# Altium PCB TX.PcbDoc
Units mm, origin at the board's own origin, x right, y up, seen from the top; angles counter-clockwise.
Board outline 49.94 x 30.61 mm, 2 copper layers (Top Layer, Bottom Layer); 55 components, 51 nets, 204 pads, 61 vias.
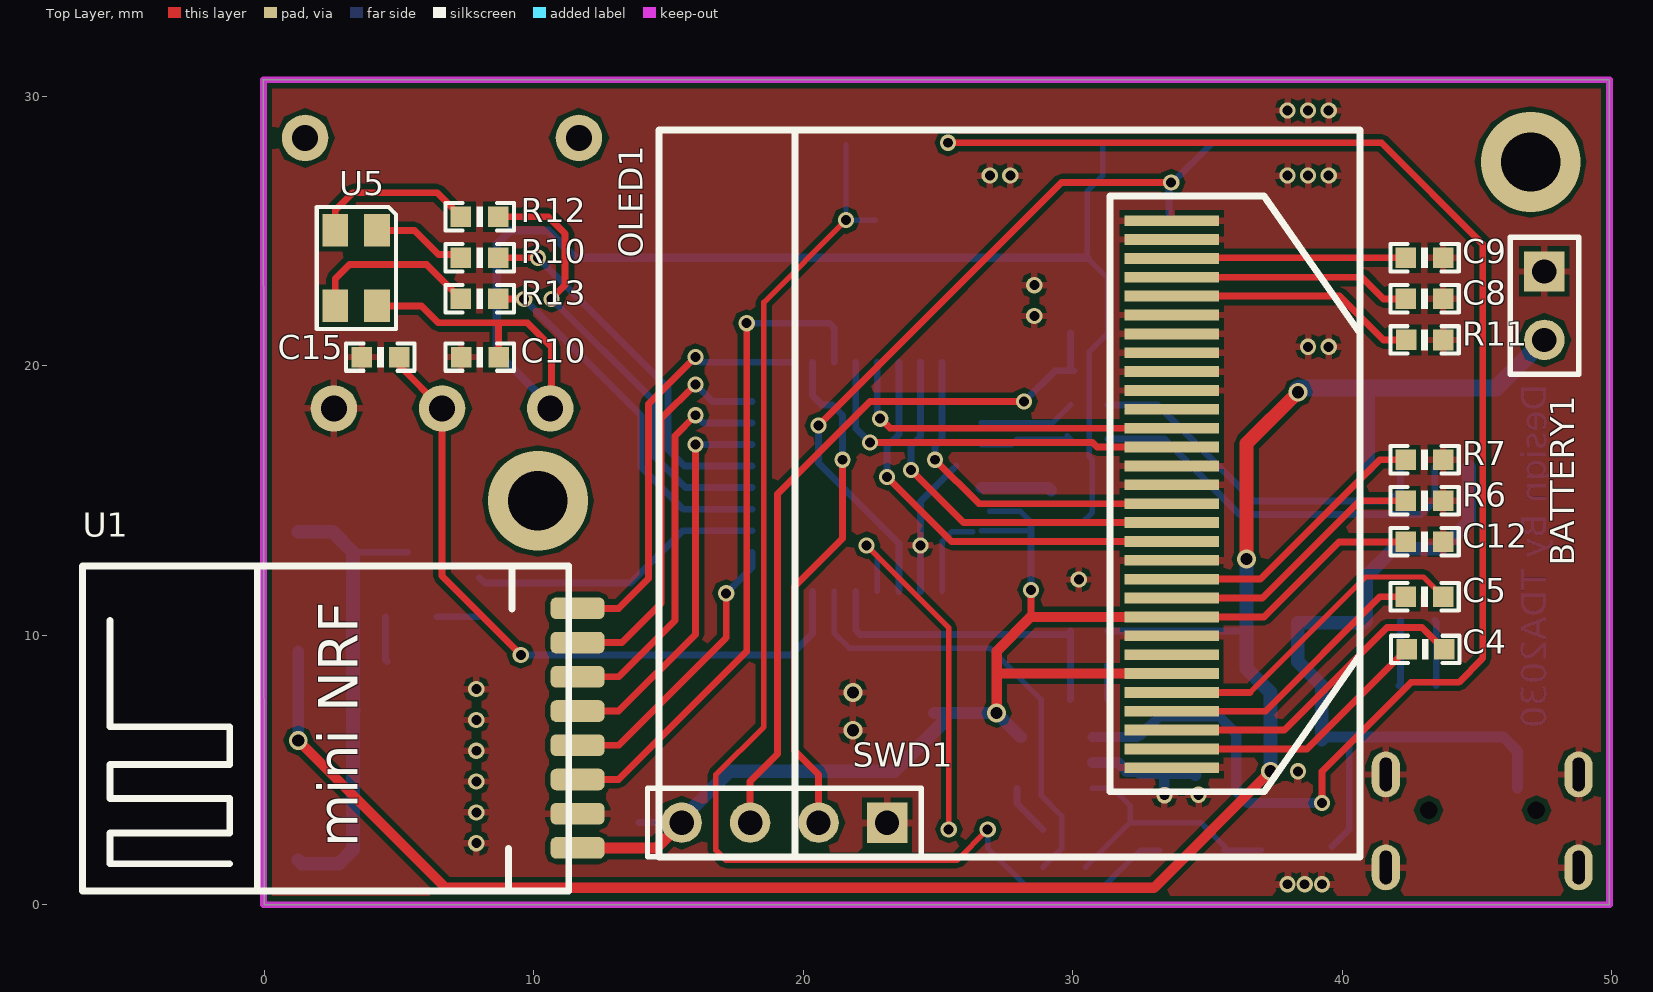
[diagram p0: Top Layer view]
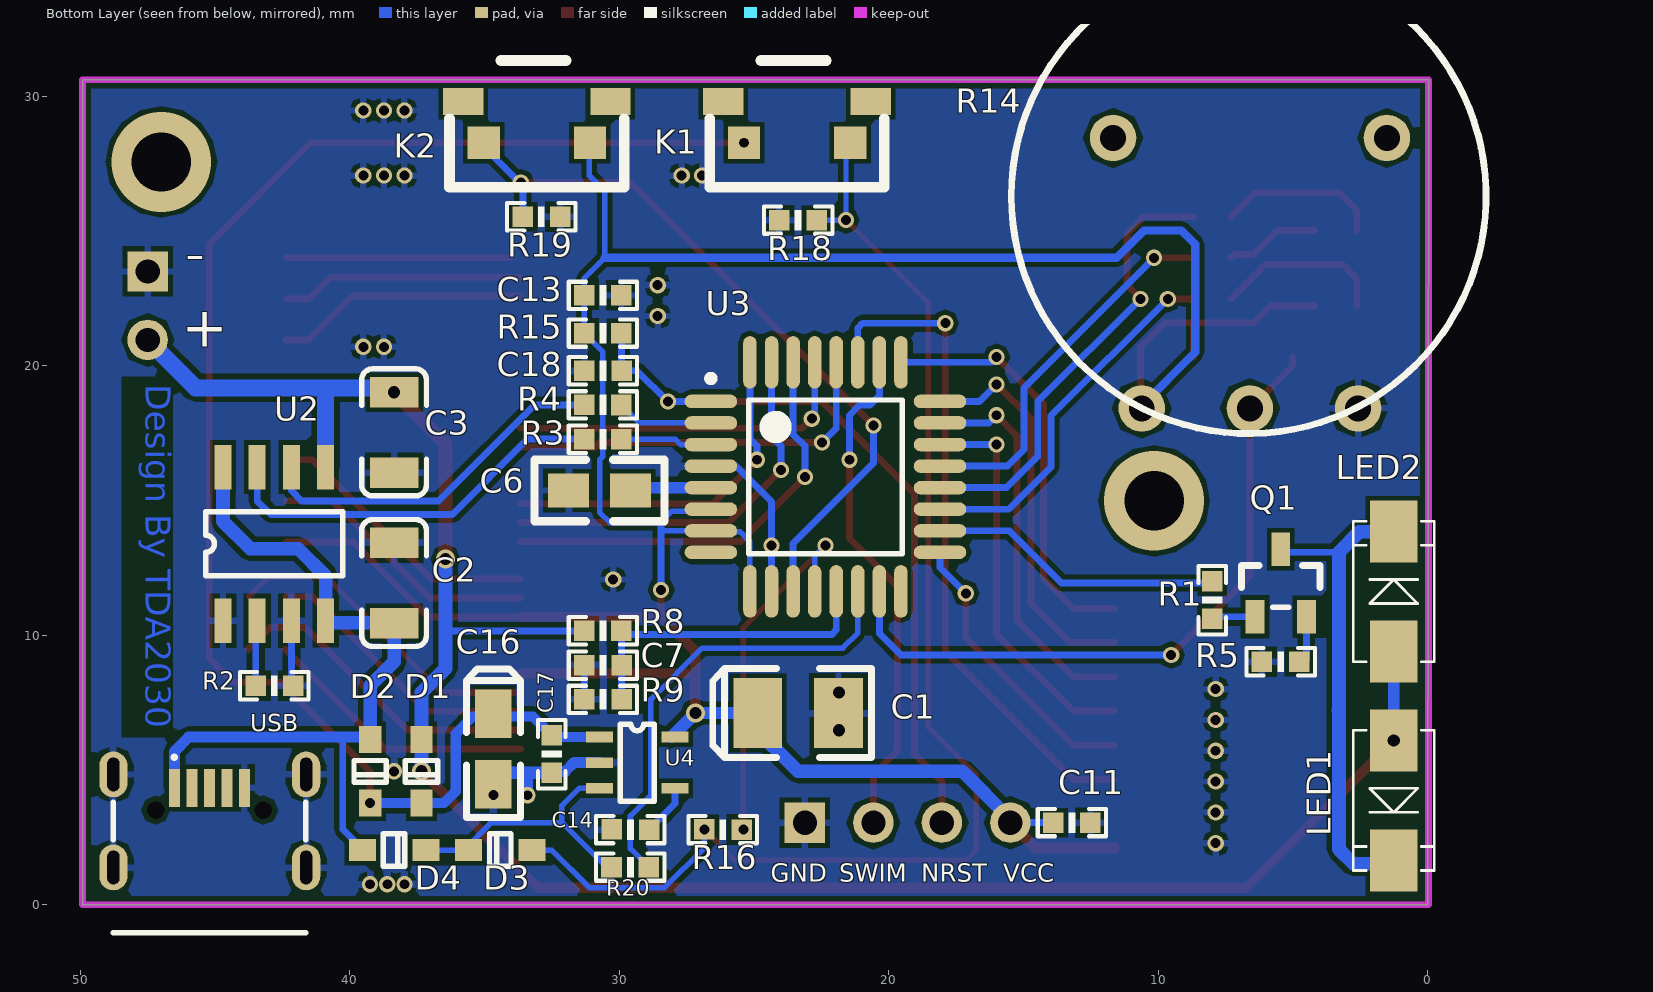
[diagram p1: Bottom Layer view, seen from below]

## Layer stack, top to bottom
Top Solder: solder mask 0.0102, Solder Resist, Dk 3.5
Top Layer: signal copper 0.0356
Dielectric1: dielectric 0.32, FR-4, Dk 4.8
Bottom Layer: signal copper 0.0356
Bottom Solder: solder mask 0.0102, Solder Resist, Dk 3.5

## Board outline
0,0 49.911,0 49.911,30.607 -0.025,30.607

## Design rules (kind name [scope] priority, off if disabled: settings)
Clearance [All] p1: gap=0.178 ignorepadtopadclearanceinfootprint=FALSE except(0: Arc-Hole Track-Hole SMDPad-Hole THPad-Hole Via-Hole Fill-Hole Poly-Hole Region-Hole Text-Hole)
FabricationTestPointUsage TestPointUsage [All] p1: valid=0 allowmultiple=FALSE
FabricationTestpoint Testpoint [All] p1: side=3 testpointundercomponent=TRUE minsize=1.016 maxsize=2.54 preferedsize=1.524 minholesize=0 maxholesize=1.016 preferedholesize=0.813 testpointgrid=0.025 allowsidetop=TRUE allowsidebottom=TRUE usegrid=TRUE gridtolerance=0
PolygonConnect [All] p1: connectstyle=Relief reliefconductorwidth=0.254 reliefentries=4 polygonreliefangle="90 Angle" airgapwidth=0.254
RoutingVias [All] p1: holewidth=0.711 width=1.27 viastyle="Through Hole" minholewidth=0.711 minwidth=1.27 maxholewidth=0.711 maxwidth=1.27
SolderMaskExpansion [All] p1: expansion=0.102
Width [All] p1: maxlimit=2.032 minlimit=0.178 preferedwidth=0.254
28 further rules are at their usual default settings.

## Components (designator, comment, footprint, x,y, rotation, side; value= is the part's Value field where it differs from the comment)
BATTERY1 "battery" HDR1X2 47.498,23.495 r270 top
C1 "100uF (107) ±10% 6.3V" CASE-B_3528 23.368,7.112 r0 bottom
C2 "10uf" 1206_C 38.354,11.938 r270 bottom
C3 "10uf" 1206_C 38.354,17.526 r90 bottom
C4 "1uf" 0603P 43.078,9.476 r0 top
C5 "1uf" 0603P 43.053,11.43 r180 top
C6 "10UF" 0805 29.591,15.367 r0 bottom
C7 "104" 0603P 30.607,8.89 r180 bottom
C8 "1uf" 0603P 43.053,22.479 r180 top
C9 "1uf" 0603P 43.053,24.003 r180 top
C10 "104" 0603P 8.001,20.32 r0 top
C11 "104" 0603P 13.208,3.048 r0 bottom
C12 "104" 0603P 43.053,13.462 r180 top
C13 "104" 0603P 30.607,22.606 r0 bottom
C14 "104" 0603P 29.591,2.794 r180 bottom
C15 "104" 0603P 4.318,20.32 r0 top
C16 "10uF" CASE-A_3216 34.671,5.78 r90 bottom
C17 "104" 0603P 32.512,5.588 r90 bottom
C18 "10UF" 0603P 30.607,19.812 r180 bottom
D1 "1N4148WS T4" SOD-323 37.338,4.953 r90 bottom
D2 "1N4148WS T4" SOD-323 39.243,4.953 r90 bottom
D3 "1N4148WS T4" SOD-323 34.417,2.032 r180 bottom
D4 "1N4148WS T4" SOD-323 38.354,2.032 r0 bottom
K1 "KEY" 侧贴按键 25.375,28.27 r180 bottom
K2 "KEY" 侧贴按键 35.027,28.27 r180 bottom
LED1 "LED" DIODE_3*5.3 1.27,3.81 r270 bottom
LED2 "LED" DIODE_3*5.3 1.27,11.684 r90 bottom
OLED1 "OLED12864" OLED_0.96 33.669,5.08 r90 top locked
Q1 "SS8050 Y1" SOT-23(SOT-23-3) 5.461,11.938 r270 bottom
R1 "1K" 0603P 8.001,11.303 r90 bottom
R2 "1.2K" 0603P 42.799,8.128 r180 bottom
R3 "1K" 0603P 30.607,17.272 r0 bottom
R4 "1K" 0603P 30.607,18.542 r0 bottom
R5 "22Ω" 0603P 5.461,9.017 r0 bottom
R6 "4.7K" 0603P 43.053,14.986 r180 top
R7 "4.7K" 0603P 43.053,16.51 r180 top
R8 "100K" 0603P 30.607,10.16 r0 bottom
R9 "100K" 0603P 30.607,7.62 r180 bottom
R10 "220Ω" 0603P 8.001,24.003 r180 top
R11 "910K" 0603P 43.053,20.955 r0 top
R12 "220Ω" 0603P 8.001,25.527 r180 top
R13 "220Ω" 0603P 8.001,22.479 r180 top
R14 "RPot" R_variable 11.684,28.448 r180 bottom locked
R15 "10K" 0603P 30.607,21.209 r0 bottom
R16 "1K" 0603P 26.162,2.794 r180 bottom
R18 "10K" 0603P 23.368,25.4 r0 bottom
R19 "1K" 0603P 32.893,25.527 r180 bottom
R20 "1K" 0603P 29.591,1.397 r0 bottom
SWD1 "SWD" HDR1X4 23.114,3.048 r180 top
U1 "NRF24L01" miniNRF24L01 10.922,1.778 r90 top locked
U2 "TP4056-SOT8" SOP-8 44.704,10.541 r90 bottom
U3 "STM8S105KXT6C" TQFP32 22.352,15.875 r180 bottom locked
U4 "SPX3819" SOT25-5 30.734,6.223 r180 bottom
U5 "LED_RGB" LED_RGB 4.191,25.019 r270 top
USB "USB口" "MICRO USB" 48.768,4.826 r180 bottom locked

## Footprints (in the part's own frame and the unit in brackets; to place one, negate y for a bottom-side part, rotate by r counter-clockwise, add the part's x,y. Pads: shape width x height; smd on the part's side, far side on the other; paste and mask are expansions set on the pad)
0603P [mil]
  rect 30x30 smd: 1(-27,0) 2(27.5,-0.06)
  silkscreen extent -50,-20 50,20
0805 [mil]
  rect 60x50 smd: 1(0,-0.06) 2(90,-0.06)
  silkscreen extent -50,-45 140,45
1206_C [mm]
  rect 1.13x1.8 smd: 1(-1.49,0) 2(1.49,0)
  silkscreen extent -2.36,-1.2 2.35,1.2, body extent -1.6,-0.81 1.6,0.79, height 1
CASE-A_3216 [mm]
  rect 1.8x1.35 smd: 1(1.31,0) 2(-1.31,0)
  silkscreen extent -2.54,-1 2.97,1, body extent -1.7,-0.84 1.7,0.84, height 1.71
CASE-B_3528 [mm]
  rect 1.8x2.6 smd: 1(1.5,0) 2(-1.5,0)
  silkscreen extent -2.73,-1.65 3.16,1.65, body extent -1.85,-1.47 1.85,1.46, height 2.03
DIODE_3*5.3 [mm]
  rect 2.3x1.75 smd: 1(-2.286,0) 2(2.159,0)
  silkscreen extent -2.67,-1.5 2.54,1.5
HDR1X2 [mm]
  rect 1.5x1.5 hole 0.9: 1(0,0)
  round 1.5 hole 0.9: 2(2.54,0)
  silkscreen extent -1.27,-1.27 3.81,1.27
HDR1X4 [mm]
  rect 1.5x1.5 hole 0.9: 1(0,0)
  round 1.5 hole 0.9: 2(2.54,0) 3(5.08,0) 4(7.62,0)
  silkscreen extent -1.27,-1.27 8.89,1.27
LED_RGB [mm]
  rect 1.2x0.95 smd: 1(0,0) 2(2.8,0) 3(2.8,-1.55) 4(0,-1.55)
  silkscreen extent -0.86,-2.24 3.66,0.71
"MICRO USB" [mm]
  rect 0.4x1.4 smd: 1(2.265,-0.49) 2(2.915,-0.49) 3(3.565,-0.49) 4(4.215,-0.49) 5(4.865,-0.49)
  oval 1.05x1.7 hole 0.45 slot 1.25 at 90 deg: 6(7.15,0.01) 7(7.15,-3.44) 8(0,0.01) 9(0,-3.44)
  round 0.3 hole 0.65: MH1(1.565,-1.315) MH2(5.565,-1.315)
  silkscreen extent 0,-5.87 7.14,0.65
miniNRF24L01 [mm]
  rrect50% 0.8x2 smd: 1(0.33,-0.711) 2(1.6,-0.711) 3(2.87,-0.711) 4(4.14,-0.711) 5(5.41,-0.711) 6(6.68,-0.711) 7(7.95,-0.711) 8(9.22,-0.711)
  silkscreen extent -1.27,-0.38 10.79,17.65
OLED_0.96 [mm]
  rect 0.4x3.5 smd: 1(0,0) 2(0.7,0) 3(1.4,0) 4(2.1,0) 5(2.8,0) 6(3.5,0) 7(4.2,0) 8(4.9,0) 9(5.6,0) 10(6.3,0) 11(7,0) 12(7.7,0) 13(8.4,0) 14(9.1,0) 15(9.8,0) 16(10.5,0) 17(11.2,0) 18(11.9,0) 19(12.6,0) 20(13.3,0) 21(14,0) 22(14.7,0) 23(15.4,0) 24(16.1,0) 25(16.8,0) 26(17.5,0) 27(18.2,0) 28(18.9,0) 29(19.6,0) 30(20.3,0)
  silkscreen extent -3.3,-6.98 23.66,19.01
R_variable [mil]
  round 67.87 hole 37.87: 1(42,-395) 2(200,-395) 3(358,-395) 4(0,0) 4(400,0)
  silkscreen extent -149,-432 545,262
SOD-323 [mm]
  rect 1x0.83 smd: 1(1.18,0) 2(-1.18,0)
  silkscreen extent -0.4,-0.6 0.4,0.6, body extent -1.35,-0.62 1.35,0.63, height 1.1
SOP-8 [mil]
  rect 65x25 smd: 1(0,0) 2(0,-50) 3(0,-100) 4(0,-150) 5(224.41,-150) 6(224.41,-100) 7(224.41,-50) 8(224.41,0)
  silkscreen extent 65,-175 159,25
SOT25-5 [mm]
  rect 1x0.4 smd: 1(0,0) 2(0,-0.95) 3(0,-1.9) 4(2.8,-1.9) 5(2.8,0)
  silkscreen extent 0.76,-2.38 2.03,0.48
SOT-23(SOT-23-3) [mm]
  rect 1.25x0.7 smd: 1(1.25,-0.95) 2(1.25,0.95) 3(-1.25,0)
  silkscreen extent -0.65,-1.46 0.9,1.46, body extent -1.5,-1.5 1.5,1.5, height 1.3
TQFP32 [mm] "Thin QFP, 32-Leads, Body 7x7mm, Pitch 0.8mm, IPC Low Density"
  oval 1.95x0.5 smd: 1(-4.25,2.8) 2(-4.25,2) 3(-4.25,1.2) 4(-4.25,0.4) 5(-4.25,-0.4) 6(-4.25,-1.2) 7(-4.25,-2) 8(-4.25,-2.8) 17(4.25,-2.8) 18(4.25,-2) 19(4.25,-1.2) 20(4.25,-0.4) 21(4.25,0.4) 22(4.25,1.2) 23(4.25,2) 24(4.25,2.8)
  oval 0.5x1.95 smd: 9(-2.8,-4.25) 10(-2,-4.25) 11(-1.2,-4.25) 12(-0.4,-4.25) 13(0.4,-4.25) 14(1.2,-4.25) 15(2,-4.25) 16(2.8,-4.25) 25(2.8,4.25) 26(2,4.25) 27(1.2,4.25) 28(0.4,4.25) 29(-0.4,4.25) 30(-1.2,4.25) 31(-2,4.25) 32(-2.8,4.25)
  silkscreen extent -4.38,-2.85 2.85,3.77, body extent -3.5,-3.5 3.5,3.5, height 1.2
侧贴按键 [mm]
  rect 1.2x1.2 smd: 1(0,0) 2(3.937,0)
  rect 1.5x1 smd: 3(-0.762,1.524) 3(4.699,1.524)
  silkscreen extent -1.27,-1.65 5.21,3.05

## Part data
BATTERY1: library part "Header 2", "Header, 2-Pin"
C1: library part "3528 100uF (107) 10% 6.3V", "钽电容"
C2 C3: library part C_3
C4 C5 C6 C7 C8 C9 C10 C11 C12 C13 C14 C15 C17 C18: library part C
C16: library part "3216 10uF (106) 10% 16V", "钽电容"
D1 D2 D3 D4: library part "SOD-323 1N4148WS T4", "二极管"
K1 K2: library part KEY_M
LED1 LED2: library part LED2, "Typical RED, GREEN, YELLOW, AMBER GaAs LED"
Q1: library part "SOT-23 SS8050 Y1", "三极管"
R1 R2 R3 R4 R5 R6 R7 R8 R9 R10 R11 R12 R13 R15 R16 R18 R19 R20: library part R
R14: "Potentiometer"
SWD1: library part "Header 4", "Header, 4-Pin"
U2: library part TP4056
U3: library part STM8S103K3T6, "ST 8-bit  Microcontroller"
U5: "全彩LED"

## Via types
v1: diameter 0.6, hole 0.37, Top Layer to Bottom Layer, 52 vias
v2: diameter 0.7, hole 0.45, Top Layer to Bottom Layer, 7 vias
v3: diameter 3.7, hole 2.2, Top Layer to Bottom Layer, 2 vias

## Nets (pads, with @x,y where several pads share a name; then routed paths per layer and width w, separated by ;. In a path a pad name is that pad's centre, name@x,y a point inside that pad or via, vN(x,y) a via of type N, cw(c..) or ccw(c..) an arc to the next point about the centre after c; other vN are vias at no path point)
BAT_ADC: C7.2 R8.1 R9.2 U3.13 | length 12
  Bottom Layer w0.254: U3.13 21.952,10.194 22.113,10.033 R8.1@29.921,10.033 ; R9.2 29.921,7.631 R8.1
CHRG: R3.1 U3.3 | length 3.6
  Bottom Layer w0.203: U3.3 27.728,17.075 27.925,17.272 R3.1 R3.1@29.794,17.399
GND: BATTERY1.1 C1.2 C2.1 C3.1 C6.2 C7.1 C8.1 C9.1 C10.1 C11.1 C12.1 C13.1 C14.1 C15.1 C16.2 C17.1 C18.1 OLED1.1 OLED1.8 OLED1.12 OLED1.16 OLED1.17 OLED1.21 OLED1.22 OLED1.23 OLED1.24 OLED1.25 OLED1.29 OLED1.30 R2.2 R5.2 R6.1 R7.1 R9.1 R11.2 R14.3 R18.2 R19.2 SWD1.1 U1.2 U2.1 U2.3 U3.4 U3.10 U4.2 USB.5 USB.6 USB.7 USB.8 USB.9 | length 13.7
  Bottom Layer w0.254: U3.10 24.352,14.954 U3.4@25.673,16.275 ; R9.1 C7.1 ; R2.2 42.164,8.19 U2.3
  Bottom Layer w0.381: v1(33.401,4.064) 33.401,4.902
  Bottom Layer w0.406: U4.2 31.684,5.273 32.004,4.953 32.461,4.953 C17.1
  Bottom Layer w0.457: C17.1 34.468,4.902 C16.2@34.544,4.826
  other v1: 37.973,0.762 38.608,0.762 39.243,0.762 7.874,2.286 7.874,3.429 34.671,4.08 7.874,4.572 38.354,4.953 7.874,5.715 7.874,6.858 7.874,8.001 30.226,12.065 24.352,13.335 38.735,20.701 39.497,20.701 28.575,21.844 28.575,22.987 26.924,27.051 27.686,27.051 37.973,27.051 38.735,27.051 39.497,27.051 37.973,29.464 38.735,29.464 39.497,29.464
  other v2: 21.844,6.477 21.844,7.874
KEY2: K2.1 R19.1 U3.11 | length 27.6
  Top Layer w0.254: v1(20.574,17.78) 29.591,26.797 v1(33.655,26.797)
  Bottom Layer w0.254: v1(20.574,17.78) 20.574,16.383 23.552,13.405 U3.11 ; R19.1 33.579,26.721 v1(33.655,26.797) 33.706,26.797 K2.1@35.179,28.27
LED_B: R13.2 U5.3 | length 6.4
  Top Layer w0.254: U5.3 2.641,23.215 3.175,23.749 6.034,23.749 R13.2
LED_G: R12.2 U5.4 | length 6
  Top Layer w0.254: U5.4 2.641,25.755 3.302,26.416 6.415,26.416 R12.2
LED_LG: R1.2 U3.18 | length 11
  Bottom Layer w0.254: R1.2@7.999,12.128 8.19,11.938 13.589,11.938 15.526,13.875 U3.18
LED_R: R10.2 U5.1 | length 3.5
  Top Layer w0.254: U5.1 5.588,25.019 6.477,24.13 7.177,24.13 R10.2
NetC4_1: C4.1 OLED1.2 | length 10.3
  Top Layer w0.254: OLED1.2 38.697,5.78 C4.1
NetC4_2: C4.2 OLED1.3 | length 12
  Top Layer w0.254: OLED1.3 37.849,6.48 41.656,10.287 42.964,10.287 C4.2
NetC5_1: C5.1 OLED1.5 | length 12.1
  Top Layer w0.203: 36.582,7.88 40.862,12.16 43.009,12.16 C5.1
  Top Layer w0.254: OLED1.5 36.582,7.88
NetC5_2: C5.2 OLED1.4 | length 10.4
  Top Layer w0.254: OLED1.4 37.152,7.18 41.402,11.43 42.353,11.43 C5.2
NetC6_1: C6.1 U3.5 | length 2.7
  Bottom Layer w0.432: U3.5 29.102,15.475 C6.1@29.21,15.367
NetC8_2: C8.2 OLED1.27 | length 9
  Top Layer w0.254: OLED1.27 40.728,23.28 41.529,22.479 42.353,22.479 C8.2
NetC9_2: C9.2 OLED1.28 | length 8.3
  Top Layer w0.254: OLED1.28@34.036,24.003 34.038,24.005 C9.2
NetC14_2: C14.2 U4.4 | length 1.9
  Bottom Layer w0.254: U4.4 27.934,3.751 C14.2
NetC16_1: C16.1 C17.2 D1.2 D2.2 K1.1 U4.1 | length 56.9
  Top Layer w0.254: v1(25.375,28.27) 41.453,28.27 45.212,24.511 45.212,9.144 44.323,8.255 42.545,8.255 39.243,4.953 v1(39.243,3.773)
  Bottom Layer w0.381: U4.1 C17.2@32.385,6.223 ; C17.2 33.209,6.985 35.433,6.985 36.068,6.35 36.068,4.216 36.511,3.773 v1(39.243,3.773)
NetLED1_2: LED1.2 LED2.2 Q1.3 | length 17.7
  Bottom Layer w0.254: 3.302,13.081 Q1.3@5.334,13.081
  Bottom Layer w0.508: LED1.2 1.397,1.524 2.77,1.524 3.302,2.056 3.302,13.081 2.54,13.843 LED2.2 ; 3.302,7.239 3.322,7.219
NetOLED1_10: OLED1.10 R6.2 | length 10.2
  Top Layer w0.254: OLED1.10 37.034,11.38 40.642,14.988 R6.2
NetOLED1_11: OLED1.11 R7.2 | length 10.5
  Top Layer w0.254: OLED1.11 36.972,12.08 41.404,16.512 R7.2
NetOLED1_26: OLED1.26 R11.1 | length 9.4
  Top Layer w0.254: OLED1.26 39.904,22.58 41.529,20.955 R11.1
NetQ1_1: Q1.1 R1.1 | length 1.6
  Bottom Layer w0.254: Q1.1 7.945,10.688 R1.1@8.001,10.744
NetQ1_2: Q1.2 R5.1 | length 1.7
  Bottom Layer w0.254: Q1.2 4.511,9.078 R5.1@4.572,9.017
NetR2_1: R2.1 U2.2 | length 2.4
  Bottom Layer w0.254: U2.2 43.485,10.49 R2.1
NetR3_2: R3.2 U2.7 | length 14.8
  Bottom Layer w0.254: R3.2 33.399,17.274 36.195,14.478 42.926,14.478 43.434,14.986 U2.7
NetR4_2: R4.2 U2.6 | length 13.4
  Bottom Layer w0.254: R4.2 33.145,18.544 36.703,14.986 41.783,14.986 42.164,15.367 U2.6
NetR10_1: R10.1 U3.21 | length 14
  Top Layer w0.254: R10.1 v1(10.16,24.003)
  Bottom Layer w0.254: v1(10.16,24.003) 14.986,19.177 14.986,16.891 15.602,16.275 U3.21
NetR12_1: R12.1 U3.20 | length 16.9
  Top Layer w0.254: R12.1 10.541,25.527 11.171,24.897 11.171,22.992 10.668,22.489 v1(10.668,22.479)
  Bottom Layer w0.254: v1(10.668,22.479) 14.478,18.669 14.478,16.637 15.64,15.475 U3.20
NetR13_1: R13.1 U3.19 | length 13.8
  Top Layer w0.254: R13.1 v1(9.652,22.479)
  Bottom Layer w0.254: v1(9.652,22.479) 13.986,18.145 13.986,16.24 15.551,14.675 U3.19
NetR16_2: R16.2 U3.12 | length 13.9
  Top Layer w0.203: v1(22.352,13.335) 25.4,10.287 v1(25.4,2.794) v1@25.273,2.667
  Bottom Layer w0.203: v1(22.352,13.335) 22.752,12.935 U3.12
NetR20_1: R20.1 U3.14 | length 17.1
  Bottom Layer w0.203: U3.14 21.152,10.09 21.717,9.525 26.924,9.525 28.829,7.62 28.829,4.064 29.591,3.302 29.591,2.083 R20.1
NRF_CE: U1.3 U3.27 | length 25
  Top Layer w0.254: U1.3 13.157,4.648 17.907,9.398 v1(17.907,21.575)
  Bottom Layer w0.254: v1(17.907,21.575) 20.97,21.575 21.152,21.393 U3.27
NRF_CSN: U1.4 U3.17 | length 10.7
  Top Layer w0.254: U1.4 13.157,5.918 17.145,9.906 v1(17.145,11.557)
  Bottom Layer w0.254: v1(17.145,11.557) 18.102,12.514 U3.17
NRF_IRQ: U1.8 U3.25 | length 15.7
  Top Layer w0.254: U1.8 13.157,10.998 14.26,12.101 14.26,18.578 v1(16.002,20.32)
  Bottom Layer w0.254: v1(16.002,20.32) 16.197,20.125 U3.25
NRF_MISO: U1.7 U3.24 | length 14.7
  Top Layer w0.254: U1.7 13.284,9.728 14.732,11.176 14.732,18.034 v1(16.002,19.304)
  Bottom Layer w0.254: v1(16.002,19.304) 16.631,18.675 U3.24
NRF_MOSI: U1.6 U3.23 | length 14.6
  Top Layer w0.254: U1.6 13.157,8.458 15.24,10.541 15.24,17.399 v1(16.002,18.161)
  Bottom Layer w0.254: v1(16.002,18.161) 16.288,17.875 U3.23
NRF_SCK: U1.5 U3.22 | length 14.7
  Top Layer w0.254: U1.5 13.157,7.188 16.002,10.033 v1(16.002,17.075)
  Bottom Layer w0.254: v1(16.002,17.075) U3.22
NRST: C18.2 R15.1 SWD1.3 U3.1 | length 28.5
  Top Layer w0.254: SWD1.3 18.034,4.572 19.05,5.588 19.05,15.24 22.485,18.675 v1(28.194,18.675)
  Bottom Layer w0.254: U3.1 28.2,18.675 29.335,19.81 C18.2@30.048,19.81 ; C18.2@29.845,19.81 29.921,19.887 R15.1
OLED_CS: OLED1.13 U3.30 | length 16
  Top Layer w0.254: v1(23.114,15.875) 25.509,13.48 OLED1.13
  Bottom Layer w0.254: v1(23.114,15.875) 23.114,17.018 23.552,17.456 U3.30
OLED_D0: OLED1.18 U3.28 | length 14.5
  Top Layer w0.254: v1(22.479,17.145) 30.734,17.145 30.899,16.98 OLED1.18
  Bottom Layer w0.254: U3.28 21.952,17.672 v1(22.479,17.145)
OLED_D1: OLED1.19 U3.29 | length 13.1
  Top Layer w0.254: v1(22.86,18.034) 23.214,17.68 OLED1.19
  Bottom Layer w0.254: U3.29 22.752,18.142 v1(22.86,18.034)
OLED_DC: OLED1.15 U3.32 | length 13.2
  Top Layer w0.254: v1(24.892,16.51) 26.522,14.88 OLED1.15
  Bottom Layer w0.254: v1(24.892,16.51) 24.892,17.018 25.152,17.278 U3.32
OLED_RES: OLED1.14 U3.31 | length 14.6
  Top Layer w0.254: v1(24.003,16.129) 25.952,14.18 OLED1.14
  Bottom Layer w0.254: v1(24.003,16.129) 24.003,17.018 24.352,17.367 U3.31
POWER_5.0: C2.2 D2.1 D4.1 U2.4 U2.8 USB.1 | length 28.7
  Bottom Layer w0.254: D4.1@39.624,2.159 40.259,2.794 40.259,6.223
  Bottom Layer w0.406: D2.1@39.333,6.223 45.974,6.223 46.503,5.694 USB.1
  Bottom Layer w0.508: D2.1 39.243,8.128 38.354,9.017 38.354,10.454 38.367,10.467 40.82,10.467 U2.4 40.894,12.192 41.91,13.208 43.688,13.208 44.704,14.224 U2.8
STDBY: R4.1 U3.2 | length 3.6
  Bottom Layer w0.203: U3.2 29.254,17.875 R4.1
SWIM: SWD1.2 U3.26 | length 18.9
  Top Layer w0.254: SWD1.2 20.574,4.826 19.685,5.715 19.685,11.811 21.463,13.589 v1(21.463,16.51)
  Bottom Layer w0.254: U3.26 20.352,18.891 20.701,18.542 21.082,18.542 21.463,18.161 v1(21.463,16.51)
THROTTLE_ADC: C15.2 R14.2 U3.15 | length 25.6
  Top Layer w0.254: C15.2 5.016,20.002 R14.2 6.604,12.192 v1(9.525,9.271)
  Bottom Layer w0.254: v1(9.525,9.271) 19.558,9.271 20.352,10.065 U3.15
VCC3.3: C1.1 C10.2 C11.2 C12.2 C13.2 K2.2 OLED1.6 OLED1.9 R14.1 R15.2 SWD1.4 U1.1 U3.6 U3.7 U3.9 U4.5 U5.2 | length 113.6
  Top Layer w0.254: U5.2 5.848,22.219 6.477,21.59 9.779,21.59 10.668,20.701 10.668,18.466 R14.1 ; 8.636,21.59 8.7,21.526 C10.2 ; 28.448,10.68 v1(28.448,11.684) ; OLED1.9 37.096,10.68 39.88,13.464 C12.2
  Top Layer w0.381: v2(27.178,7.112) 27.178,9.413 28.445,10.68 OLED1.9 ; 27.178,8.58 OLED1.6
  Top Layer w0.406: U1.1 14.554,2.108 SWD1.4
  Bottom Layer w0.203: U3.9 25.152,13.468 25.527,13.843 U3.7@26.289,13.843 ; U3.7 28.416,13.875 28.448,13.843 ; U3.6@26.924,14.605 28.052,14.605 28.477,14.18 30.353,14.18 30.734,14.561 30.734,16.51 30.607,16.637 30.607,20.512 R15.2 31.305,23.241 30.543,24.003 30.543,26.479 31.115,27.051 K2.2@31.115,28.194
  Bottom Layer w0.254: C11.2 SWD1.4@15.492,3.05 ; SWD1.4@16,3.05 SWD1.4@16.002,3.048 ; v1(28.448,11.684) 28.448,14.18
  Bottom Layer w0.305: R14.1@10.668,18.466 8.636,20.498 8.636,24.511 9.144,25.019 10.541,25.019 11.557,24.003 30.543,24.003
  Bottom Layer w0.457: C1.1 v2(27.178,7.112) U4.5@28.067,6.223
  Bottom Layer w0.508: SWD1.4 15.494,3.175 17.272,4.953 23.368,4.953 C1.1@25.146,6.731
VCC_BAT: BATTERY1.2 C3.2 D1.1 LED1.1 LED2.1 R8.2 U2.5 | length 76.6
  Top Layer w0.381: v2(1.27,6.096) 6.731,0.635 33.02,0.635 v2(37.338,4.953)
  Top Layer w0.508: v2(36.449,12.827) 36.449,17.111 v2(38.354,19.016)
  Bottom Layer w0.254: R8.2 36.447,10.162 36.449,10.16 ; 36.447,9.4 36.449,9.398
  Bottom Layer w0.432: v2(1.27,6.096) LED2.1
  Bottom Layer w0.508: v2(36.449,12.827) 36.449,8.763 37.338,7.874 v2(37.338,4.953)
  Bottom Layer w0.635: C3.2@38.341,19.124 38.394,19.177 45.72,19.177 BATTERY1.2 ; U2.5 40.894,19.177
VCC_CHK: D3.1 K1.2 R16.1 R18.1 | length 48.2
  Top Layer w0.203: v1(21.59,25.4) 18.542,22.352 18.542,6.604 16.764,4.826 16.764,2.032 17.145,1.651 25.702,1.651 v1@26.845,2.794
  Bottom Layer w0.203: K1.2@21.59,28.194 v1(21.59,25.4) R18.1 ; R16.1@26.845,2.794 26.845,2.111 28.321,0.635 31.115,0.635 32.512,2.032 D3.1
  other v1: 26.848,2.794
VCC_EN: D3.2 D4.2 R20.2 U4.3 | length 10.1
  Bottom Layer w0.203: R20.2@30.48,1.397 32.131,3.048 ; U4.3 31.491,4.323 32.131,3.683 32.131,3.048 ; D3.2 D4.2@37.004,2.032 ; D3.2@35.767,2.032 34.751,3.048 32.131,3.048
pads on no net: K1.3 K2.3 OLED1.7 OLED1.20 R14.4 U3.8 U3.16 USB.2 USB.3 USB.4 USB.MH1 USB.MH2
copper on no net:
  other v3: 10.16,14.986 46.99,27.559

## Polygon pours and split planes (outlines as drawn)
GND on Top Layer "Bottom Layer-No Net" (solid, remove dead copper, pour order 0): -0.006,30.658 49.803,30.658 49.93,30.531 49.93,0.178 -0.006,0.178
GND on Bottom Layer "Bottom Layer-No Net" (solid, remove dead copper, pour order 2): -0.006,30.531 49.93,30.531 49.93,-0.076 49.803,0.051 -0.006,0.051

## Keep-outs
Keep-Out Layer:
  lines w0.254: -0.025,0 49.911,0 49.911,30.607 -0.025,30.607 -0.025,0

## Other copper
Bottom Layer:
  text "Design By TDA2030" at 47.879,19.304 h1.6 r90

## Silkscreen, mask and mechanical layers (free items; w line width, h text height)
Bottom Overlay:
  text "-" at 46.101,22.987 h2.54
  text "+" at 46.228,20.193 h2.54
  text "VCC" at 15.748,0.635 h1.14
  text "NRST" at 18.796,0.635 h1.14
  text "SWIM" at 21.844,0.635 h1.14
  text "GND" at 24.384,0.635 h1.14
Bottom Paste:
  text "Design By TDA2030" at 47.879,19.304 h1.6 r90
Bottom Solder:
  text "Design By TDA2030" at 47.879,19.304 h1.6 r90

## Dimensions
33.147,32.385 to 49.911,34.798 on Top Overlay
23.495,32.258 to 49.911,37.465 on Top Overlay
10.16,14.986 to -0.025,0 on Top Overlay
10.16,14.986 to -0.025,0 on Top Overlay
49.911,30.607 to 49.911,0 on Top Overlay
-0.025,30.607 to 49.911,30.607 on Top Overlay

## Text inside footprints (layer, text, board x,y; h text height)
U1: Top Overlay "mini NRF" at 3.962,2.134 h2.52 r90